# Altium PCB Flexi_encoder_BOB.pcbdoc (part 2 of 3)
Units mil, origin at the board's own origin, x right, y up, seen from the top; angles counter-clockwise.
Board outline 1230.32 x 1046.59 mil, 2 copper layers (Top Layer, Bottom Layer), stack 57.918 mil thick; 19 components, 15 nets, 2516 pads, 15 vias.
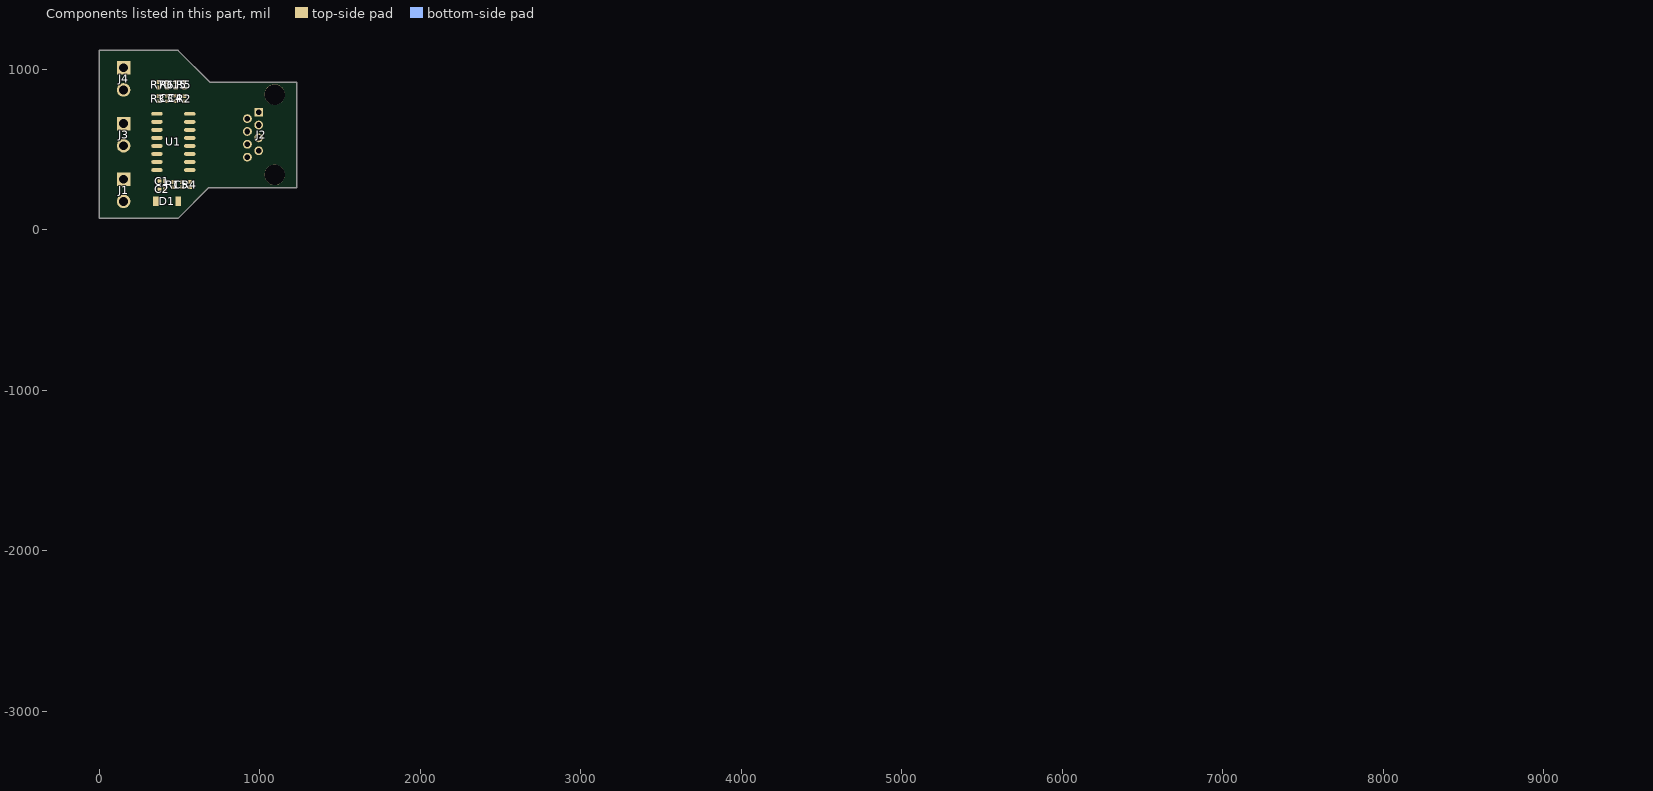
[diagram p2: the components of this part, seen from the top]

## Free pads (board coordinates)
  round 1.64 on Mech7: 1(8578.33,-3063.27) 1(8578.33,-3063.27) 1(8578.78,-3056.56) 1(8578.78,-3056.56) 1(8579.23,-3063.73) 1(8579.23,-3063.73) 1(8579.65,-3054.78) 1(8579.65,-3054.78) 1(8580.56,-3049.4) 1(8580.56,-3049.4) 1(8581.89,-3062.82) 1(8581.89,-3062.82) 1(8582.8,-3044.02) 1(8582.8,-3044.02) 1(8583.25,-3040.91) 1(8583.25,-3040.91) 1(8585.04,-3037.31) 1(8585.04,-3037.31) 1(8585.49,-3059.25) 1(8585.49,-3059.25) 1(8585.49,-3035.07) 1(8585.49,-3035.07) 1(8585.94,-3057.89) 1(8585.94,-3057.89) 1(8586.82,-3057.44) 1(8586.82,-3057.44) 1(8587.27,-3056.11) 1(8587.27,-3056.11) 1(8588.6,-3054.78) 1(8588.6,-3054.78) 1(8588.6,-3028.82) 1(8588.6,-3028.82) 1(8589.05,-3053.42) 1(8589.05,-3053.42) 1(8589.96,-3023.89) 1(8589.96,-3023.89) 1(8590.42,-3052.09) 1(8590.42,-3052.09) 1(8591.29,-3022.11) 1(8591.29,-3022.11) 1(8591.74,-3019.87) 1(8591.74,-3019.87) 1(8592.2,-3048.07) 1(8592.2,-3048.07) 1(8593.07,-3047.62) 1(8593.07,-3047.62) 1(8593.07,-3017.63) 1(8593.07,-3017.63) 1(8593.53,-3046.25) 1(8593.53,-3046.25) 1(8593.53,-3015.4) 1(8593.53,-3015.4) 1(8594.44,-3045.84) 1(8594.44,-3045.84) 1(8594.44,-2870.03) 1(8594.44,-2870.03) 1(8594.89,-3044.47) 1(8594.89,-3044.47) 1(8594.89,-2859.3) 1(8594.89,-2859.3) 1(8595.76,-2882.99) 1(8595.76,-2882.99) 1(8595.76,-2857.97) 1(8595.76,-2857.97) 1(8596.22,-3043.15) 1(8596.22,-3043.15) 1(8596.22,-3010.93) 1(8596.22,-3010.93) 1(8596.67,-3041.78) 1(8596.67,-3041.78) 1(8596.67,-3008.69) 1(8596.67,-3008.69) 1(8596.67,-2884.81) 1(8596.67,-2884.81) 1(8597.13,-2888.83) 1(8597.13,-2888.83) 1(8597.13,-2857.52) 1(8597.13,-2857.52) 1(8597.55,-2858.39) 1(8597.55,-2858.39) 1(8598,-3040.45) 1(8598,-3040.45) 1(8598.45,-2892.85) 1(8598.45,-2892.85) 1(8598.45,-2858.39) 1(8598.45,-2858.39) 1(8599.36,-3003.76) 1(8599.36,-3003.76) 1(8599.78,-3036.44) 1(8599.78,-3036.44) 1(8599.78,-3001.52) 1(8599.78,-3001.52) 1(8600.69,-2905.36) 1(8600.69,-2905.36) 1(8600.69,-2861.54) 1(8600.69,-2861.54) 1(8601.15,-3035.07) 1(8601.15,-3035.07) 1(8601.6,-3033.75) 1(8601.6,-3033.75) 1(8601.6,-2863.77) 1(8601.6,-2863.77) 1(8602.02,-2863.77) 1(8602.02,-2863.77) 1(8602.93,-3032.42) 1(8602.93,-3032.42) 1(8602.93,-2911.65) 1(8602.93,-2911.65) 1(8603.38,-3031.05) 1(8603.38,-3031.05) 1(8603.38,-2866.92) 1(8603.38,-2866.92) 1(8603.84,-2866.92) 1(8603.84,-2866.92) 1(8604.26,-2993.49) 1(8604.26,-2993.49) 1(8604.26,-2869.15) 1(8604.26,-2869.15) 1(8604.71,-3029.73) 1(8604.71,-3029.73) 1(8604.71,-2991.25) 1(8604.71,-2991.25) 1(8604.71,-2869.15) 1(8604.71,-2869.15) 1(8605.16,-3028.36) 1(8605.16,-3028.36) 1(8605.16,-2921.92) 1(8605.16,-2921.92) 1(8605.62,-2872.26) 1(8605.62,-2872.26) 1(8606.07,-2872.26) 1(8606.07,-2872.26) 1(8606.49,-3027.04) 1(8606.49,-3027.04) 1(8606.95,-3025.71) 1(8606.95,-3025.71) 1(8607.4,-2876.74) 1(8607.4,-2876.74) 1(8607.85,-2876.74) 1(8607.85,-2876.74) 1(8608.31,-2878.97) 1(8608.31,-2878.97) 1(8608.73,-2878.97) 1(8608.73,-2878.97) 1(8609.64,-3022.11) 1(8609.64,-3022.11) 1(8610.09,-3020.78) 1(8610.09,-3020.78) 1(8610.09,-2980.98) 1(8610.09,-2980.98) 1(8610.09,-2882.99) 1(8610.09,-2882.99) 1(8610.55,-2882.99) 1(8610.55,-2882.99) 1(8610.96,-2938.03) 1(8610.96,-2938.03) 1(8610.96,-2885.23) 1(8610.96,-2885.23) 1(8611.42,-2941.14) 1(8611.42,-2941.14) 1(8611.42,-2885.23) 1(8611.42,-2885.23) 1(8611.87,-2887.46) 1(8611.87,-2887.46) 1(8612.33,-3017.63) 1(8612.33,-3017.63) 1(8612.33,-2977.83) 1(8612.33,-2977.83) 1(8612.33,-2887.46) 1(8612.33,-2887.46) 1(8612.78,-2943.83) 1(8612.78,-2943.83) 1(8612.78,-2889.7) 1(8612.78,-2889.7) 1(8613.2,-3015.4) 1(8613.2,-3015.4) 1(8613.2,-2975.6) 1(8613.2,-2975.6) 1(8613.2,-2946.98) 1(8613.2,-2946.98) 1(8613.2,-2889.7) 1(8613.2,-2889.7) 1(8614.11,-3014.94) 1(8614.11,-3014.94) 1(8614.11,-2893.3) 1(8614.11,-2893.3) 1(8614.56,-3013.62) 1(8614.56,-3013.62) 1(8614.56,-2893.3) 1(8614.56,-2893.3) 1(8615.02,-2895.54) 1(8615.02,-2895.54) 1(8615.44,-2895.54) 1(8615.44,-2895.54) 1(8615.89,-3012.29) 1(8615.89,-3012.29) 1(8615.89,-2953.69) 1(8615.89,-2953.69) 1(8615.89,-2897.77) 1(8615.89,-2897.77) 1(8616.35,-3010.93) 1(8616.35,-3010.93) 1(8616.35,-2969.8) 1(8616.35,-2969.8) 1(8616.35,-2955.92) 1(8616.35,-2955.92) 1(8616.35,-2897.77) 1(8616.35,-2897.77) 1(8616.8,-2900.01) 1(8616.8,-2900.01) 1(8617.26,-2900.01) 1(8617.26,-2900.01) 1(8617.67,-2902.25) 1(8617.67,-2902.25) 1(8618.13,-3009.14) 1(8618.13,-3009.14) 1(8618.13,-2959.49) 1(8618.13,-2959.49) 1(8618.13,-2902.25) 1(8618.13,-2902.25) 1(8618.58,-3007.82) 1(8618.58,-3007.82) 1(8618.58,-2966.65) 1(8618.58,-2966.65) 1(8618.58,-2961.72) 1(8618.58,-2961.72) 1(8618.58,-2904.48) 1(8618.58,-2904.48) 1(8619.04,-2904.48) 1(8619.04,-2904.48) 1(8619.49,-2964.41) 1(8619.49,-2964.41) 1(8619.91,-3006.45) 1(8619.91,-3006.45) 1(8619.91,-2963.96) 1(8619.91,-2963.96) 1(8619.91,-2907.59) 1(8619.91,-2907.59) 1(8620.37,-3005.12) 1(8620.37,-3005.12) 1(8620.37,-2907.59) 1(8620.37,-2907.59) 1(8620.82,-2909.83) 1(8620.82,-2909.83) 1(8621.27,-2909.83) 1(8621.27,-2909.83) 1(8621.73,-3003.76) 1(8621.73,-3003.76) 1(8622.15,-2912.97) 1(8622.15,-2912.97) 1(8622.6,-3001.52) 1(8622.6,-3001.52) 1(8622.6,-2912.97) 1(8622.6,-2912.97) 1(8623.51,-3001.11) 1(8623.51,-3001.11) 1(8623.96,-2999.74) 1(8623.96,-2999.74) 1(8624.38,-2916.54) 1(8624.38,-2916.54) 1(8625.75,-2997.96) 1(8625.75,-2997.96) 1(8626.2,-2996.63) 1(8626.2,-2996.63) 1(8626.2,-2922.83) 1(8626.2,-2922.83) 1(8626.62,-2922.83) 1(8626.62,-2922.83) 1(8627.08,-2996.18) 1(8627.08,-2996.18) 1(8627.08,-2925.07) 1(8627.08,-2925.07) 1(8627.53,-2994.82) 1(8627.53,-2994.82) 1(8627.53,-2925.07) 1(8627.53,-2925.07) 1(8628.44,-2994.4) 1(8628.44,-2994.4) 1(8628.86,-2993.03) 1(8628.86,-2993.03) 1(8629.76,-2992.58) 1(8629.76,-2992.58) 1(8630.22,-2991.25) 1(8630.22,-2991.25) 1(8631.55,-2990.34) 1(8631.55,-2990.34) 1(8632.46,-2934.88) 1(8632.46,-2934.88) 1(8632.91,-2937.12) 1(8632.91,-2937.12) 1(8633.33,-2937.12) 1(8633.33,-2937.12) 1(8634.24,-2939.81) 1(8634.24,-2939.81) 1(8635.57,-2997.96) 1(8635.57,-2997.96) 1(8636.93,-2937.12) 1(8636.93,-2937.12) 1(8637.38,-2935.79) 1(8637.38,-2935.79) 1(8639.17,-2932.65) 1(8639.17,-2932.65) 1(8640.49,-2931.32) 1(8640.49,-2931.32) 1(8640.95,-2929.96) 1(8640.95,-2929.96) 1(8641.86,-3010.05) 1(8641.86,-3010.05) 1(8642.28,-3011.38) 1(8642.28,-3011.38) 1(8642.73,-2928.63) 1(8642.73,-2928.63) 1(8643.18,-2927.3) 1(8643.18,-2927.3) 1(8644.09,-2926.85) 1(8644.09,-2926.85) 1(8644.51,-3014.52) 1(8644.51,-3014.52) 1(8644.51,-2925.48) 1(8644.51,-2925.48) 1(8644.97,-3015.85) 1(8644.97,-3015.85) 1(8646.33,-3017.18) 1(8646.33,-3017.18) 1(8646.75,-3018.54) 1(8646.75,-3018.54) 1(8647.2,-2922.83) 1(8647.2,-2922.83) 1(8647.66,-2921.47) 1(8647.66,-2921.47) 1(8648.11,-3019.87) 1(8648.11,-3019.87) 1(8648.57,-3021.23) 1(8648.57,-3021.23) 1(8648.98,-2967.98) 1(8648.98,-2967.98) 1(8649.44,-3021.65) 1(8649.44,-3021.65) 1(8649.44,-2967.98) 1(8649.44,-2967.98) 1(8649.44,-2918.36) 1(8649.44,-2918.36) 1(8649.89,-3023.02) 1(8649.89,-3023.02) 1(8650.35,-2970.21) 1(8650.35,-2970.21) 1(8650.8,-2970.21) 1(8650.8,-2970.21) 1(8651.22,-2965.74) 1(8651.22,-2965.74) 1(8651.22,-2916.99) 1(8651.22,-2916.99) 1(8651.68,-2964.41) 1(8651.68,-2964.41) 1(8651.68,-2915.67) 1(8651.68,-2915.67) 1(8652.13,-3026.13) 1(8652.13,-3026.13) 1(8652.13,-2973.36) 1(8652.13,-2973.36) 1(8652.58,-3027.49) 1(8652.58,-3027.49) 1(8652.58,-2973.36) 1(8652.58,-2973.36) 1(8653.46,-2975.6) 1(8653.46,-2975.6) 1(8653.46,-2963.09) 1(8653.46,-2963.09) 1(8653.91,-3028.82) 1(8653.91,-3028.82) 1(8653.91,-2975.6) 1(8653.91,-2975.6) 1(8653.91,-2961.72) 1(8653.91,-2961.72) 1(8654.37,-3030.18) 1(8654.37,-3030.18) 1(8654.82,-2977.83) 1(8654.82,-2977.83) 1(8655.28,-2977.83) 1(8655.28,-2977.83) 1(8655.69,-3031.51) 1(8655.69,-3031.51) 1(8655.69,-2960.39) 1(8655.69,-2960.39) 1(8656.15,-3032.84) 1(8656.15,-3032.84) 1(8656.15,-2980.07) 1(8656.15,-2980.07) 1(8656.15,-2959.03) 1(8656.15,-2959.03) 1(8656.15,-2911.65) 1(8656.15,-2911.65) 1(8656.6,-2980.07) 1(8656.6,-2980.07) 1(8656.6,-2910.28) 1(8656.6,-2910.28) 1(8657.06,-3033.29) 1(8657.06,-3033.29) 1(8657.51,-3034.65) 1(8657.51,-3034.65) 1(8657.51,-2982.31) 1(8657.51,-2982.31) 1(8657.93,-2982.31) 1(8657.93,-2982.31) 1(8658.39,-3035.07) 1(8658.39,-3035.07) 1(8658.39,-2983.63) 1(8658.39,-2983.63) 1(8658.39,-2957.25) 1(8658.39,-2957.25) 1(8658.39,-2908.96) 1(8658.39,-2908.96) 1(8658.84,-3036.44) 1(8658.84,-3036.44) 1(8658.84,-2983.63) 1(8658.84,-2983.63) 1(8658.84,-2955.92) 1(8658.84,-2955.92) 1(8658.84,-2907.59) 1(8658.84,-2907.59) 1(8659.29,-2985) 1(8659.29,-2985) 1(8659.75,-3036.89) 1(8659.75,-3036.89) 1(8659.75,-2985) 1(8659.75,-2985) 1(8660.17,-3038.22) 1(8660.17,-3038.22) 1(8660.17,-2986.32) 1(8660.17,-2986.32) 1(8660.62,-2986.32) 1(8660.62,-2986.32) 1(8660.62,-2906.27) 1(8660.62,-2906.27) 1(8661.08,-2987.69) 1(8661.08,-2987.69) 1(8661.08,-2904.94) 1(8661.08,-2904.94) 1(8661.53,-3039.13) 1(8661.53,-3039.13) 1(8661.53,-2987.69) 1(8661.53,-2987.69) 1(8661.98,-3040.45) 1(8661.98,-3040.45) 1(8661.98,-2989.01) 1(8661.98,-2989.01) 1(8662.4,-2989.01) 1(8662.4,-2989.01) 1(8663.31,-2903.12) 1(8663.31,-2903.12) 1(8663.77,-3041.78) 1(8663.77,-3041.78) 1(8663.77,-2901.79) 1(8663.77,-2901.79) 1(8664.22,-3043.15) 1(8664.22,-3043.15) 1(8664.22,-2992.16) 1(8664.22,-2992.16) 1(8664.64,-2992.16) 1(8664.64,-2992.16) 1(8665.55,-2993.94) 1(8665.55,-2993.94) 1(8666,-3044.47) 1(8666,-3044.47) 1(8666,-2993.94) 1(8666,-2993.94) 1(8666.46,-3045.84) 1(8666.46,-3045.84) 1(8666.46,-2995.27) 1(8666.46,-2995.27) 1(8666.88,-2995.27) 1(8666.88,-2995.27) 1(8667.79,-2997.05) 1(8667.79,-2997.05) 1(8668.24,-3047.16) 1(8668.24,-3047.16) 1(8668.24,-2997.05) 1(8668.24,-2997.05) 1(8668.69,-3048.49) 1(8668.69,-3048.49) 1(8668.69,-2998.41) 1(8668.69,-2998.41) 1(8669.11,-2998.41) 1(8669.11,-2998.41) 1(8670.02,-3000.2) 1(8670.02,-3000.2) 1(8670.48,-3049.86) 1(8670.48,-3049.86) 1(8670.48,-3000.2) 1(8670.48,-3000.2) 1(8670.93,-3051.18) 1(8670.93,-3051.18) 1(8670.93,-3001.52) 1(8670.93,-3001.52) 1(8670.93,-2944.28) 1(8670.93,-2944.28) 1(8671.35,-3001.52) 1(8671.35,-3001.52) 1(8671.35,-2942.96) 1(8671.35,-2942.96) 1(8672.26,-3003.34) 1(8672.26,-3003.34) 1(8672.71,-3003.34) 1(8672.71,-3003.34) 1(8673.17,-3004.67) 1(8673.17,-3004.67) 1(8673.59,-3004.67) 1(8673.59,-3004.67) 1(8673.59,-2940.72) 1(8673.59,-2940.72) 1(8674.5,-3006.45) 1(8674.5,-3006.45) 1(8674.95,-3006.45) 1(8674.95,-3006.45) 1(8674.95,-2940.27) 1(8674.95,-2940.27) 1(8676.28,-3007.82) 1(8676.28,-3007.82) 1(8676.28,-2938.48) 1(8676.28,-2938.48) 1(8676.73,-3009.14) 1(8676.73,-3009.14) 1(8677.19,-3009.14) 1(8677.19,-3009.14) 1(8677.64,-2938.03) 1(8677.64,-2938.03) 1(8678.97,-3010.93) 1(8678.97,-3010.93) 1(8678.97,-2886.59) 1(8678.97,-2886.59) 1(8679.42,-3012.29) 1(8679.42,-3012.29) 1(8679.88,-3012.29) 1(8679.88,-3012.29) 1(8680.3,-2886.14) 1(8680.3,-2886.14) 1(8682.11,-2933.1) 1(8682.11,-2933.1) 1(8683.44,-2932.65) 1(8683.44,-2932.65) 1(8684.35,-3016.76) 1(8684.35,-3016.76) 1(8684.35,-2881.66) 1(8684.35,-2881.66) 1(8684.77,-3018.09) 1(8684.77,-3018.09) 1(8684.77,-2930.87) 1(8684.77,-2930.87) 1(8685.22,-3018.09) 1(8685.22,-3018.09) 1(8685.68,-2881.21) 1(8685.68,-2881.21) 1(8686.13,-2930.41) 1(8686.13,-2930.41) 1(8687.46,-3067.75) 1(8687.46,-3067.75) 1(8687.46,-2879.43) 1(8687.46,-2879.43) 1(8687.91,-2928.17) 1(8687.91,-2928.17) 1(8688.82,-3068.2) 1(8688.82,-3068.2) 1(8688.82,-2878.97) 1(8688.82,-2878.97) 1(8689.24,-2927.72) 1(8689.24,-2927.72) 1(8690.15,-3069.98) 1(8690.15,-3069.98) 1(8690.15,-2877.19) 1(8690.15,-2877.19) 1(8691.48,-3070.44) 1(8691.48,-3070.44) 1(8691.48,-2876.74) 1(8691.48,-2876.74) 1(8691.93,-2925.07) 1(8691.93,-2925.07) 1(8693.3,-3072.67) 1(8693.3,-3072.67) 1(8693.3,-2924.61) 1(8693.3,-2924.61) 1(8693.3,-2874.5) 1(8693.3,-2874.5) 1(8693.71,-2923.7) 1(8693.71,-2923.7) 1(8694.62,-3073.09) 1(8694.62,-3073.09) 1(8694.62,-2874.04) 1(8694.62,-2874.04) 1(8695.08,-2923.25) 1(8695.08,-2923.25) 1(8695.95,-3074.91) 1(8695.95,-3074.91) 1(8695.95,-2872.26) 1(8695.95,-2872.26) 1(8696.86,-3030.18) 1(8696.86,-3030.18) 1(8697.31,-3075.33) 1(8697.31,-3075.33) 1(8697.31,-2871.81) 1(8697.31,-2871.81) 1(8697.77,-3030.18) 1(8697.77,-3030.18) 1(8697.77,-2920.59) 1(8697.77,-2920.59) 1(8698.19,-3076.69) 1(8698.19,-3076.69) 1(8699.1,-2920.14) 1(8699.1,-2920.14) 1(8699.1,-2870.03) 1(8699.1,-2870.03) 1(8699.55,-3077.15) 1(8699.55,-3077.15) 1(8699.55,-3032.42) 1(8699.55,-3032.42) 1(8700,-3078.02) 1(8700,-3078.02) 1(8700.42,-3032.42) 1(8700.42,-3032.42) 1(8700.42,-2869.57) 1(8700.42,-2869.57) 1(8700.88,-2918.36) 1(8700.88,-2918.36) 1(8701.33,-3078.47) 1(8701.33,-3078.47) 1(8701.79,-3079.38) 1(8701.79,-3079.38) 1(8702.24,-2917.9) 1(8702.24,-2917.9) 1(8702.24,-2867.79) 1(8702.24,-2867.79) 1(8702.66,-3035.07) 1(8702.66,-3035.07) 1(8703.11,-3079.8) 1(8703.11,-3079.8) 1(8703.57,-3035.07) 1(8703.57,-3035.07) 1(8703.57,-2867.34) 1(8703.57,-2867.34) 1(8704.02,-2916.12) 1(8704.02,-2916.12) 1(8704.48,-3081.17) 1(8704.48,-3081.17) 1(8705.35,-3037.31) 1(8705.35,-3037.31) 1(8705.35,-2915.67) 1(8705.35,-2915.67) 1(8705.35,-2865.55) 1(8705.35,-2865.55) 1(8705.81,-3081.62) 1(8705.81,-3081.62) 1(8706.26,-3037.31) 1(8706.26,-3037.31) 1(8707.13,-3082.95) 1(8707.13,-3082.95) 1(8707.13,-3038.67) 1(8707.13,-3038.67) 1(8707.13,-2913.88) 1(8707.13,-2913.88) 1(8708.04,-3038.67) 1(8708.04,-3038.67) 1(8708.5,-3039.55) 1(8708.5,-3039.55) 1(8708.5,-2913.43) 1(8708.5,-2913.43) 1(8708.95,-2912.52) 1(8708.95,-2912.52) 1(8709.37,-3083.86) 1(8709.37,-3083.86) 1(8709.37,-3039.55) 1(8709.37,-3039.55) 1(8710.28,-3040.91) 1(8710.28,-3040.91) 1(8710.28,-2863.32) 1(8710.28,-2863.32) 1(8710.73,-3085.18) 1(8710.73,-3085.18) 1(8711.19,-3040.91) 1(8711.19,-3040.91) 1(8711.61,-3041.78) 1(8711.61,-3041.78) 1(8712.06,-3085.64) 1(8712.06,-3085.64) 1(8712.06,-2911.19) 1(8712.06,-2911.19) 1(8712.06,-2861.54) 1(8712.06,-2861.54) 1(8712.52,-3041.78) 1(8712.52,-3041.78) 1(8713.42,-3086.97) 1(8713.42,-3086.97) 1(8713.42,-3043.15) 1(8713.42,-3043.15) 1(8713.42,-2909.83) 1(8713.42,-2909.83) 1(8714.3,-3043.15) 1(8714.3,-3043.15) 1(8714.75,-3087.42) 1(8714.75,-3087.42) 1(8714.75,-3044.02) 1(8714.75,-3044.02) 1(8714.75,-2909.41) 1(8714.75,-2909.41) 1(8715.21,-2908.5) 1(8715.21,-2908.5) 1(8715.21,-2860.21) 1(8715.21,-2860.21) 1(8715.66,-3044.02) 1(8715.66,-3044.02) 1(8716.53,-3045.38) 1(8716.53,-3045.38) 1(8717.44,-3045.38) 1(8717.44,-3045.38) 1(8717.9,-3089.66) 1(8717.9,-3089.66) 1(8717.9,-3046.25) 1(8717.9,-3046.25) 1(8718.32,-2906.72) 1(8718.32,-2906.72) 1(8718.77,-3046.25) 1(8718.77,-3046.25) 1(8718.77,-2857.97) 1(8718.77,-2857.97) 1(8719.23,-3090.11) 1(8719.23,-3090.11) 1(8719.23,-3047.16) 1(8719.23,-3047.16) 1(8720.13,-3047.16) 1(8720.13,-3047.16) 1(8720.55,-3048.07) 1(8720.55,-3048.07) 1(8720.55,-2905.81) 1(8720.55,-2905.81) 1(8721.46,-3048.07) 1(8721.46,-3048.07) 1(8721.92,-3048.95) 1(8721.92,-3048.95) 1(8721.92,-2904.48) 1(8721.92,-2904.48) 1(8721.92,-2856.15) 1(8721.92,-2856.15) 1(8722.37,-3092.35) 1(8722.37,-3092.35) 1(8722.79,-3048.95) 1(8722.79,-3048.95) 1(8723.24,-3049.86) 1(8723.24,-3049.86) 1(8724.15,-3049.86) 1(8724.15,-3049.86) 1(8725.03,-2902.7) 1(8725.03,-2902.7) 1(8725.48,-3051.18) 1(8725.48,-3051.18) 1(8726.39,-3051.18) 1(8726.39,-3051.18) 1(8728.17,-2900.88) 1(8728.17,-2900.88) 1(8730.41,-2900.47) 1(8730.41,-2900.47) 1(8730.86,-3096.82) 1(8730.86,-3096.82) 1(8733.1,-3097.28) 1(8733.1,-3097.28) 1(8733.97,-3098.15) 1(8733.97,-3098.15) 1(8736.21,-3098.6) 1(8736.21,-3098.6) 1(8736.21,-2848.57) 1(8736.21,-2848.57) 1(8738.03,-3099.93) 1(8738.03,-3099.93) 1(8738.45,-2895.99) 1(8738.45,-2895.99) 1(8740.26,-3100.39) 1(8740.26,-3100.39) 1(8740.68,-2895.54) 1(8740.68,-2895.54) 1(8741.14,-2847.21) 1(8741.14,-2847.21) 1(8741.59,-3059.25) 1(8741.59,-3059.25) 1(8741.59,-2894.63) 1(8741.59,-2894.63) 1(8742.92,-3059.25) 1(8742.92,-3059.25) 1(8743.37,-3102.17) 1(8743.37,-3102.17) 1(8743.83,-2845.43) 1(8743.83,-2845.43) 1(8744.74,-3060.58) 1(8744.74,-3060.58) 1(8745.15,-2893.75) 1(8745.15,-2893.75) 1(8746.06,-3060.58) 1(8746.06,-3060.58) 1(8746.97,-3061.49) 1(8746.97,-3061.49) 1(8748.3,-3061.49) 1(8748.3,-3061.49) 1(8748.75,-2891.94) 1(8748.75,-2891.94) 1(8750.54,-3062.82) 1(8750.54,-3062.82) 1(8750.99,-3104.86) 1(8750.99,-3104.86) 1(8751.44,-2843.19) 1(8751.44,-2843.19) 1(8751.86,-3062.82) 1(8751.86,-3062.82) 1(8755.46,-3064.6) 1(8755.46,-3064.6) 1(8756.34,-2889.7) 1(8756.34,-2889.7) 1(8756.79,-3064.6) 1(8756.79,-3064.6) 1(8758.57,-3107.55) 1(8758.57,-3107.55) 1(8759.48,-3065.97) 1(8759.48,-3065.97) 1(8759.48,-2840.08) 1(8759.48,-2840.08) 1(8759.94,-2887.92) 1(8759.94,-2887.92) 1(8761.26,-3065.97) 1(8761.26,-3065.97) 1(8762.17,-3066.84) 1(8762.17,-3066.84) 1(8763.5,-3066.84) 1(8763.5,-3066.84) 1(8763.5,-2839.62) 1(8763.5,-2839.62) 1(8764.41,-2887.04) 1(8764.41,-2887.04) 1(8766.65,-3067.75) 1(8766.65,-3067.75) 1(8767.1,-2885.68) 1(8767.1,-2885.68) 1(8767.52,-2837.84) 1(8767.52,-2837.84) 1(8770.66,-3069.07) 1(8770.66,-3069.07) 1(8771.12,-3110.69) 1(8771.12,-3110.69) 1(8772.9,-3069.07) 1(8772.9,-3069.07) 1(8774.23,-3069.98) 1(8774.23,-3069.98) 1(8774.23,-2883.9) 1(8774.23,-2883.9) 1(8775.14,-3111.11) 1(8775.14,-3111.11) 1(8776.05,-2836.48) 1(8776.05,-2836.48) 1(8776.47,-3069.98) 1(8776.47,-3069.98) 1(8778.28,-3070.86) 1(8778.28,-3070.86) 1(8778.28,-2883.45) 1(8778.28,-2883.45) 1(8780.94,-3070.86) 1(8780.94,-3070.86) 1(8782.3,-2882.12) 1(8782.3,-2882.12) 1(8782.76,-3071.76) 1(8782.76,-3071.76) 1(8783.63,-3113.35) 1(8783.63,-3113.35) 1(8784.54,-2834.24) 1(8784.54,-2834.24) 1(8784.99,-3071.76) 1(8784.99,-3071.76) 1(8786.77,-3072.67) 1(8786.77,-3072.67) 1(8788.1,-2881.66) 1(8788.1,-2881.66) 1(8789.01,-3072.67) 1(8789.01,-3072.67) 1(8790.34,-2880.75) 1(8790.34,-2880.75) 1(8790.79,-3073.55) 1(8790.79,-3073.55) 1(8793.03,-3073.55) 1(8793.03,-3073.55) 1(8795.72,-2832.91) 1(8795.72,-2832.91) 1(8796.17,-2880.34) 1(8796.17,-2880.34) 1(8797.05,-3074.46) 1(8797.05,-3074.46) 1(8797.96,-2832.01) 1(8797.96,-2832.01) 1(8798.41,-2879.43) 1(8798.41,-2879.43) 1(8801.52,-3074.46) 1(8801.52,-3074.46) 1(8804.21,-2878.52) 1(8804.21,-2878.52) 1(8805.54,-3075.33) 1(8805.54,-3075.33) 1(8805.99,-3116.49) 1(8805.99,-3116.49) 1(8810.01,-3075.33) 1(8810.01,-3075.33) 1(8811.83,-2830.68) 1(8811.83,-2830.68) 1(8816.72,-2877.64) 1(8816.72,-2877.64) 1(8818.96,-3076.69) 1(8818.96,-3076.69) 1(8821.19,-2830.22) 1(8821.19,-2830.22) 1(8827.9,-3076.69) 1(8827.9,-3076.69) 1(8830.14,-3117.82) 1(8830.14,-3117.82) 1(8838.21,-2877.19) 1(8838.21,-2877.19) 1(8850.27,-2830.68) 1(8850.27,-2830.68) 1(8852.09,-2878.1) 1(8852.09,-2878.1) 1(8855.2,-2830.68) 1(8855.2,-2830.68) 1(8861.03,-2879.43) 1(8861.03,-2879.43) 1(8863.27,-3077.15) 1(8863.27,-3077.15) 1(8869.52,-2879.88) 1(8869.52,-2879.88) 1(8870.4,-2832.46) 1(8870.4,-2832.46) 1(8871.31,-3117.4) 1(8871.31,-3117.4) 1(8873.09,-2880.75) 1(8873.09,-2880.75) 1(8875.78,-2832.46) 1(8875.78,-2832.46) 1(8878.92,-2881.21) 1(8878.92,-2881.21) 1(8883.82,-2882.57) 1(8883.82,-2882.57) 1(8887.87,-3075.33) 1(8887.87,-3075.33) 1(8888.29,-2834.24) 1(8888.29,-2834.24) 1(8890.98,-2883.45) 1(8890.98,-2883.45) 1(8892.34,-3074.46) 1(8892.34,-3074.46) 1(8896.36,-2836.02) 1(8896.36,-2836.02) 1(8901.29,-2886.14) 1(8901.29,-2886.14) 1(8901.71,-3074) 1(8901.71,-3074) 1(8901.71,-2836.02) 1(8901.71,-2836.02) 1(8903.53,-3114.71) 1(8903.53,-3114.71) 1(8904.4,-2886.59) 1(8904.4,-2886.59) 1(8905.76,-2887.46) 1(8905.76,-2887.46) 1(8907.09,-2837.84) 1(8907.09,-2837.84) 1(8909.78,-2837.84) 1(8909.78,-2837.84) 1(8913.35,-2888.83) 1(8913.35,-2888.83) 1(8914.71,-2889.7) 1(8914.71,-2889.7) 1(8917.82,-2840.08) 1(8917.82,-2840.08) 1(8919.18,-2890.61) 1(8919.18,-2890.61) 1(8920.51,-2840.08) 1(8920.51,-2840.08) 1(8921.42,-2891.94) 1(8921.42,-2891.94) 1(8926.31,-2892.85) 1(8926.31,-2892.85) 1(8929,-3111.57) 1(8929,-3111.57) 1(8934.84,-3110.24) 1(8934.84,-3110.24) 1(8935.71,-2896.41) 1(8935.71,-2896.41) 1(8937.07,-3069.07) 1(8937.07,-3069.07) 1(8939.31,-3068.2) 1(8939.31,-3068.2) 1(8940.64,-3109.78) 1(8940.64,-3109.78) 1(8943.33,-2898.65) 1(8943.33,-2898.65) 1(8944.2,-3067.75) 1(8944.2,-3067.75) 1(8945.57,-2900.01) 1(8945.57,-2900.01) 1(8946.02,-2846.33) 1(8946.02,-2846.33) 1(8951.82,-3107.55) 1(8951.82,-3107.55) 1(8951.82,-2901.79) 1(8951.82,-2901.79) 1(8954.06,-2849.44) 1(8954.06,-2849.44) 1(8954.97,-2903.57) 1(8954.97,-2903.57) 1(8955.38,-3065.51) 1(8955.38,-3065.51) 1(8955.84,-2849.44) 1(8955.84,-2849.44) 1(8957.62,-3107.1) 1(8957.62,-3107.1) 1(8962.55,-3065.06) 1(8962.55,-3065.06) 1(8963,-3105.77) 1(8963,-3105.77) 1(8965.24,-2906.72) 1(8965.24,-2906.72) 1(8966.57,-3063.73) 1(8966.57,-3063.73) 1(8967.93,-3105.31) 1(8967.93,-3105.31) 1(8968.39,-2908.5) 1(8968.39,-2908.5) 1(8970.17,-3104.4) 1(8970.17,-3104.4) 1(8970.62,-2908.96) 1(8970.62,-2908.96) 1(8970.62,-2854.37) 1(8970.62,-2854.37) 1(8972.4,-3063.27) 1(8972.4,-3063.27) 1(8972.4,-2854.37) 1(8972.4,-2854.37) 1(8972.86,-2910.28) 1(8972.86,-2910.28) 1(8974.19,-2855.73) 1(8974.19,-2855.73) 1(8975.51,-2855.73) 1(8975.51,-2855.73) 1(8976.42,-2856.61) 1(8976.42,-2856.61) 1(8977.75,-3061.91) 1(8977.75,-3061.91) 1(8977.75,-2856.61) 1(8977.75,-2856.61) 1(8980.44,-2912.52) 1(8980.44,-2912.52) 1(8981.8,-2858.39) 1(8981.8,-2858.39) 1(8982.68,-2913.88) 1(8982.68,-2913.88) 1(8983.59,-3061.49) 1(8983.59,-3061.49) 1(8983.59,-2858.39) 1(8983.59,-2858.39) 1(8984.91,-2914.3) 1(8984.91,-2914.3) 1(8985.37,-2859.75) 1(8985.37,-2859.75) 1(8985.82,-2915.21) 1(8985.82,-2915.21) 1(8986.28,-3101.75) 1(8986.28,-3101.75) 1(8986.7,-2859.75) 1(8986.7,-2859.75) 1(8987.6,-2860.63) 1(8987.6,-2860.63) 1(8988.06,-2915.67) 1(8988.06,-2915.67) 1(8988.93,-2860.63) 1(8988.93,-2860.63) 1(8990.3,-3100.39) 1(8990.3,-3100.39) 1(8992.99,-2862.44) 1(8992.99,-2862.44) 1(8993.4,-3059.67) 1(8993.4,-3059.67) 1(8993.86,-2918.77) 1(8993.86,-2918.77) 1(8994.31,-3099.93) 1(8994.31,-3099.93) 1(8994.77,-2862.44) 1(8994.77,-2862.44) 1(8995.22,-3058.8) 1(8995.22,-3058.8) 1(8996.55,-2863.77) 1(8996.55,-2863.77) 1(8997.46,-2919.68) 1(8997.46,-2919.68) 1(8997.88,-2863.77) 1(8997.88,-2863.77) 1(8998.33,-3098.6) 1(8998.33,-3098.6) 1(8998.79,-2864.68) 1(8998.79,-2864.68) 1(9000.11,-2864.68) 1(9000.11,-2864.68) 1(9001.02,-3058.35) 1(9001.02,-3058.35) 1(9001.02,-2921.92) 1(9001.02,-2921.92) 1(9001.02,-2865.55) 1(9001.02,-2865.55) 1(9002.35,-3098.15) 1(9002.35,-3098.15) 1(9002.35,-2865.55) 1(9002.35,-2865.55) 1(9003.26,-2922.38) 1(9003.26,-2922.38) 1(9003.26,-2866.46) 1(9003.26,-2866.46) 1(9004.59,-2866.46) 1(9004.59,-2866.46) 1(9006.41,-3096.82) 1(9006.41,-3096.82) 1(9007.28,-3056.56) 1(9007.28,-3056.56) 1(9007.73,-2925.07) 1(9007.73,-2925.07) 1(9007.73,-2868.24) 1(9007.73,-2868.24) 1(9009.06,-2868.24) 1(9009.06,-2868.24) 1(9009.97,-2925.48) 1(9009.97,-2925.48) 1(9009.97,-2869.15) 1(9009.97,-2869.15) 1(9010.42,-3096.37) 1(9010.42,-3096.37) 1(9011.3,-2869.15) 1(9011.3,-2869.15) 1(9012.21,-2926.85) 1(9012.21,-2926.85) 1(9013.11,-3056.11) 1(9013.11,-3056.11) 1(9014.44,-3095.04) 1(9014.44,-3095.04) 1(9014.44,-2927.3) 1(9014.44,-2927.3) 1(9015.77,-2871.81) 1(9015.77,-2871.81) 1(9017.13,-2871.81) 1(9017.13,-2871.81) 1(9018.01,-2929.54) 1(9018.01,-2929.54) 1(9018.01,-2872.72) 1(9018.01,-2872.72) 1(9018.46,-3094.58) 1(9018.46,-3094.58) 1(9019.37,-3054.33) 1(9019.37,-3054.33) 1(9019.37,-2872.72) 1(9019.37,-2872.72) 1(9020.24,-2929.96) 1(9020.24,-2929.96) 1(9020.24,-2873.63) 1(9020.24,-2873.63) 1(9021.61,-2873.63) 1(9021.61,-2873.63) 1(9024.72,-3092.8) 1(9024.72,-3092.8) 1(9025.62,-3053.42) 1(9025.62,-3053.42) 1(9030.55,-2935.34) 1(9030.55,-2935.34) 1(9031.01,-3091.89) 1(9031.01,-3091.89) 1(9031.43,-3051.64) 1(9031.43,-3051.64) 1(9032.79,-2879.43) 1(9032.79,-2879.43) 1(9034.12,-2879.43) 1(9034.12,-2879.43) 1(9037.26,-2938.9) 1(9037.26,-2938.9) 1(9039.5,-2939.36) 1(9039.5,-2939.36) 1(9039.95,-3050.73) 1(9039.95,-3050.73) 1(9043.52,-3088.33) 1(9043.52,-3088.33) 1(9043.97,-2884.81) 1(9043.97,-2884.81) 1(9045.3,-2884.81) 1(9045.3,-2884.81) 1(9047.08,-3048.95) 1(9047.08,-3048.95) 1(9049.77,-2887.46) 1(9049.77,-2887.46) 1(9050.23,-3047.62) 1(9050.23,-3047.62) 1(9051.13,-2887.46) 1(9051.13,-2887.46) 1(9051.55,-2888.37) 1(9051.55,-2888.37) 1(9052.46,-2888.37) 1(9052.46,-2888.37) 1(9052.92,-2946.52) 1(9052.92,-2946.52) 1(9053.79,-2889.7) 1(9053.79,-2889.7) 1(9054.7,-2889.7) 1(9054.7,-2889.7) 1(9057.84,-2891.94) 1(9057.84,-2891.94) 1(9058.72,-2891.94) 1(9058.72,-2891.94) 1(9062.74,-3045.38) 1(9062.74,-3045.38) 1(9066.79,-2896.41) 1(9066.79,-2896.41) 1(9068.12,-2896.41) 1(9068.12,-2896.41) 1(9068.57,-2897.32) 1(9068.57,-2897.32) 1(9069.45,-2897.32) 1(9069.45,-2897.32) 1(9070.81,-2898.65) 1(9070.81,-2898.65) 1(9071.26,-2955.47) 1(9071.26,-2955.47) 1(9071.68,-2898.65) 1(9071.68,-2898.65) 1(9072.59,-3043.15) 1(9072.59,-3043.15) 1(9072.59,-2956.8) 1(9072.59,-2956.8) 1(9073.92,-2957.25) 1(9073.92,-2957.25) 1(9074.83,-2900.88) 1(9074.83,-2900.88) 1(9075.74,-3041.78) 1(9075.74,-3041.78) 1(9075.74,-2900.88) 1(9075.74,-2900.88) 1(9077.06,-2959.49) 1(9077.06,-2959.49) 1(9079.75,-2903.12) 1(9079.75,-2903.12) 1(9080.21,-2961.27) 1(9080.21,-2961.27) 1(9081.08,-2904.48) 1(9081.08,-2904.48) 1(9081.99,-2904.48) 1(9081.99,-2904.48) 1(9083.32,-2905.81) 1(9083.32,-2905.81) 1(9084.23,-3078.02) 1(9084.23,-3078.02) 1(9084.23,-2905.81) 1(9084.23,-2905.81) 1(9085.56,-2907.17) 1(9085.56,-2907.17) 1(9086.47,-2907.17) 1(9086.47,-2907.17) 1(9087.34,-3077.57) 1(9087.34,-3077.57) 1(9087.79,-2908.5) 1(9087.79,-2908.5) 1(9088.7,-3039.55) 1(9088.7,-3039.55) 1(9088.7,-2908.5) 1(9088.7,-2908.5) 1(9089.57,-2966.2) 1(9089.57,-2966.2) 1(9090.48,-3076.24) 1(9090.48,-3076.24) 1(9092.26,-2910.74) 1(9092.26,-2910.74) 1(9092.72,-2967.98) 1(9092.72,-2967.98) 1(9093.63,-3075.78) 1(9093.63,-3075.78) 1(9095.41,-3037.31) 1(9095.41,-3037.31) 1(9095.41,-2912.97) 1(9095.41,-2912.97) 1(9095.86,-2969.8) 1(9095.86,-2969.8) 1(9096.28,-2912.97) 1(9096.28,-2912.97) 1(9096.74,-3074.46) 1(9096.74,-3074.46) 1(9096.74,-2913.88) 1(9096.74,-2913.88) 1(9097.65,-2913.88) 1(9097.65,-2913.88) 1(9098.97,-2971.58) 1(9098.97,-2971.58) 1(9098.97,-2915.21) 1(9098.97,-2915.21) 1(9099.88,-3074) 1(9099.88,-3074) 1(9099.88,-2915.21) 1(9099.88,-2915.21) 1(9102.12,-3035.98) 1(9102.12,-3035.98) 1(9102.12,-2973.36) 1(9102.12,-2973.36) 1(9102.99,-3072.67) 1(9102.99,-3072.67) 1(9103.45,-2917.45) 1(9103.45,-2917.45) 1(9105.23,-2975.14) 1(9105.23,-2975.14) 1(9106.14,-3072.22) 1(9106.14,-3072.22) 1(9106.59,-2919.68) 1(9106.59,-2919.68) 1(9107.47,-2919.68) 1(9107.47,-2919.68) 1(9107.92,-2920.59) 1(9107.92,-2920.59) 1(9108.37,-2976.92) 1(9108.37,-2976.92) 1(9108.83,-2920.59) 1(9108.83,-2920.59) 1(9109.28,-3070.86) 1(9109.28,-3070.86) 1(9109.28,-2921.47) 1(9109.28,-2921.47) 1(9110.16,-2921.47) 1(9110.16,-2921.47) 1(9110.61,-2977.83) 1(9110.61,-2977.83) 1(9110.61,-2922.38) 1(9110.61,-2922.38) 1(9111.52,-3033.75) 1(9111.52,-3033.75) 1(9111.52,-2922.38) 1(9111.52,-2922.38) 1(9111.94,-2923.25) 1(9111.94,-2923.25) 1(9112.39,-3070.44) 1(9112.39,-3070.44) 1(9112.85,-2923.25) 1(9112.85,-2923.25) 1(9113.3,-2924.16) 1(9113.3,-2924.16) 1(9113.76,-2980.07) 1(9113.76,-2980.07) 1(9114.17,-2924.16) 1(9114.17,-2924.16) 1(9114.63,-3032.42) 1(9114.63,-3032.42) 1(9114.63,-2925.07) 1(9114.63,-2925.07) 1(9115.08,-2980.52) 1(9115.08,-2980.52) 1(9115.54,-3069.07) 1(9115.54,-3069.07) 1(9115.54,-2925.07) 1(9115.54,-2925.07) 1(9116.87,-2926.39) 1(9116.87,-2926.39) 1(9117.78,-2926.39) 1(9117.78,-2926.39) 1(9118.65,-3068.62) 1(9118.65,-3068.62) 1(9118.65,-3031.96) 1(9118.65,-3031.96) 1(9118.65,-2983.21) 1(9118.65,-2983.21) 1(9119.56,-2928.17) 1(9119.56,-2928.17) 1(9120.47,-2928.17) 1(9120.47,-2928.17) 1(9121.34,-2929.54) 1(9121.34,-2929.54) 1(9121.79,-3030.6) 1(9121.79,-3030.6) 1(9121.79,-2985) 1(9121.79,-2985) 1(9122.25,-2929.54) 1(9122.25,-2929.54) 1(9123.12,-2930.87) 1(9123.12,-2930.87) 1(9123.58,-3066.84) 1(9123.58,-3066.84) 1(9124.03,-2985.87) 1(9124.03,-2985.87) 1(9124.03,-2930.87) 1(9124.03,-2930.87) 1(9124.48,-2931.78) 1(9124.48,-2931.78) 1(9125.36,-2931.78) 1(9125.36,-2931.78) 1(9125.81,-2932.65) 1(9125.81,-2932.65) 1(9126.72,-2932.65) 1(9126.72,-2932.65) 1(9127.18,-2988.11) 1(9127.18,-2988.11) 1(9128.05,-3029.73) 1(9128.05,-3029.73) 1(9128.05,-2934.01) 1(9128.05,-2934.01) 1(9128.5,-3065.97) 1(9128.5,-3065.97) 1(9128.96,-2934.01) 1(9128.96,-2934.01) 1(9130.28,-2989.47) 1(9130.28,-2989.47) 1(9130.74,-2935.79) 1(9130.74,-2935.79) 1(9131.65,-3064.6) 1(9131.65,-3064.6) 1(9131.65,-2990.8) 1(9131.65,-2990.8) 1(9131.65,-2935.79) 1(9131.65,-2935.79) 1(9132.52,-2937.12) 1(9132.52,-2937.12) 1(9132.98,-3027.94) 1(9132.98,-3027.94) 1(9132.98,-2991.25) 1(9132.98,-2991.25) 1(9133.43,-2937.12) 1(9133.43,-2937.12) 1(9134.3,-2992.58) 1(9134.3,-2992.58) 1(9134.3,-2938.48) 1(9134.3,-2938.48) 1(9134.76,-3064.15) 1(9134.76,-3064.15) 1(9135.21,-2938.48) 1(9135.21,-2938.48) 1(9135.67,-2993.03) 1(9135.67,-2993.03) 1(9135.67,-2939.36) 1(9135.67,-2939.36) 1(9136.54,-2939.36) 1(9136.54,-2939.36) 1(9136.99,-2994.4) 1(9136.99,-2994.4) 1(9136.99,-2940.27) 1(9136.99,-2940.27) 1(9137.9,-3062.82) 1(9137.9,-3062.82) 1(9137.9,-3027.04) 1(9137.9,-3027.04) 1(9137.9,-2940.27) 1(9137.9,-2940.27) 1(9138.36,-2994.82) 1(9138.36,-2994.82) 1(9139.23,-2941.59) 1(9139.23,-2941.59) 1(9139.69,-2996.18) 1(9139.69,-2996.18) 1(9140.14,-2941.59) 1(9140.14,-2941.59) 1(9141.01,-3062.36) 1(9141.01,-3062.36) 1(9141.01,-3025.71) 1(9141.01,-3025.71) 1(9141.01,-2996.63) 1(9141.01,-2996.63) 1(9141.92,-2943.38) 1(9141.92,-2943.38) 1(9142.83,-2943.38) 1(9142.83,-2943.38) 1(9143.71,-2944.74) 1(9143.71,-2944.74) 1(9144.16,-3061.04) 1(9144.16,-3061.04) 1(9144.61,-2999.29) 1(9144.61,-2999.29) 1(9144.61,-2944.74) 1(9144.61,-2944.74) 1(9145.49,-2946.07) 1(9145.49,-2946.07) 1(9145.94,-2999.74) 1(9145.94,-2999.74) 1(9146.39,-2946.07) 1(9146.39,-2946.07) 1(9146.85,-2946.98) 1(9146.85,-2946.98) 1(9147.3,-3060.58) 1(9147.3,-3060.58) 1(9147.72,-3024.34) 1(9147.72,-3024.34) 1(9147.72,-2946.98) 1(9147.72,-2946.98) 1(9148.18,-2947.85) 1(9148.18,-2947.85) 1(9149.09,-3001.98) 1(9149.09,-3001.98) 1(9149.09,-2947.85) 1(9149.09,-2947.85) 1(9149.54,-2948.76) 1(9149.54,-2948.76) 1(9150.41,-3059.25) 1(9150.41,-3059.25) 1(9150.41,-3002.43) 1(9150.41,-3002.43) 1(9150.41,-2948.76) 1(9150.41,-2948.76) 1(9150.87,-2949.67) 1(9150.87,-2949.67) 1(9151.78,-2949.67) 1(9151.78,-2949.67) 1(9152.65,-2950.99) 1(9152.65,-2950.99) 1(9153.56,-3058.8) 1(9153.56,-3058.8) 1(9153.56,-3004.67) 1(9153.56,-3004.67) 1(9153.56,-2950.99) 1(9153.56,-2950.99) 1(9154.43,-3022.11) 1(9154.43,-3022.11) 1(9154.43,-2952.32) 1(9154.43,-2952.32) 1(9154.89,-3005.12) 1(9154.89,-3005.12) 1(9155.34,-2952.32) 1(9155.34,-2952.32) 1(9156.25,-3006.45) 1(9156.25,-3006.45) 1(9156.25,-2953.69) 1(9156.25,-2953.69) 1(9156.67,-3057.44) 1(9156.67,-3057.44) 1(9157.12,-2953.69) 1(9157.12,-2953.69) 1(9157.58,-3006.91) 1(9157.58,-3006.91) 1(9158.03,-2955.01) 1(9158.03,-2955.01) 1(9158.91,-3008.23) 1(9158.91,-3008.23) 1(9158.91,-2955.01) 1(9158.91,-2955.01) 1(9159.36,-3021.23) 1(9159.36,-3021.23) 1(9159.36,-2955.92) 1(9159.36,-2955.92) 1(9159.81,-3057.02) 1(9159.81,-3057.02) 1(9160.27,-3008.69) 1(9160.27,-3008.69) 1(9160.27,-2955.92) 1(9160.27,-2955.92) 1(9160.72,-2956.8) 1(9160.72,-2956.8) 1(9161.6,-3010.05) 1(9161.6,-3010.05) 1(9161.6,-2956.8) 1(9161.6,-2956.8) 1(9162.05,-2957.7) 1(9162.05,-2957.7) 1(9162.51,-3055.65) 1(9162.51,-3055.65) 1(9162.96,-3010.47) 1(9162.96,-3010.47) 1(9162.96,-2957.7) 1(9162.96,-2957.7) 1(9163.83,-2959.03) 1(9163.83,-2959.03) 1(9164.29,-3019.42) 1(9164.29,-3019.42) 1(9164.29,-3011.83) 1(9164.29,-3011.83) 1(9164.74,-2959.03) 1(9164.74,-2959.03) 1(9165.62,-3055.2) 1(9165.62,-3055.2) 1(9165.62,-3012.29) 1(9165.62,-3012.29) 1(9165.62,-2960.39) 1(9165.62,-2960.39) 1(9166.52,-2960.39) 1(9166.52,-2960.39) 1(9166.98,-3013.62) 1(9166.98,-3013.62) 1(9167.43,-3019) 1(9167.43,-3019) 1(9167.43,-2961.72) 1(9167.43,-2961.72) 1(9168.31,-2961.72) 1(9168.31,-2961.72) 1(9169.21,-2963.09) 1(9169.21,-2963.09) 1(9169.67,-3053.42) 1(9169.67,-3053.42) 1(9170.09,-2963.09) 1(9170.09,-2963.09) 1(9170.54,-3015.85) 1(9170.54,-3015.85) 1(9171,-2964.41) 1(9171,-2964.41) 1(9171.91,-3016.31) 1(9171.91,-3016.31) 1(9171.91,-2964.41) 1(9171.91,-2964.41) 1(9172.32,-3017.63) 1(9172.32,-3017.63) 1(9172.78,-3052.97) 1(9172.78,-3052.97) 1(9172.78,-2965.74) 1(9172.78,-2965.74) 1(9173.69,-2965.74) 1(9173.69,-2965.74) 1(9174.56,-2967.1) 1(9174.56,-2967.1) 1(9175.47,-2967.1) 1(9175.47,-2967.1) 1(9176.38,-2968.43) 1(9176.38,-2968.43) 1(9177.25,-2968.43) 1(9177.25,-2968.43) 1(9178.16,-2969.8) 1(9178.16,-2969.8) 1(9179.03,-2969.8) 1(9179.03,-2969.8) 1(9180.85,-2972.03) 1(9180.85,-2972.03) 1(9181.72,-2972.03) 1(9181.72,-2972.03) 1(9183.51,-2974.27) 1(9183.51,-2974.27) 1(9184.41,-2974.27) 1(9184.41,-2974.27) 1(9185.32,-3048.49) 1(9185.32,-3048.49) 1(9185.32,-2975.6) 1(9185.32,-2975.6) 1(9186.2,-2975.6) 1(9186.2,-2975.6) 1(9187.11,-2976.92) 1(9187.11,-2976.92) 1(9187.98,-2976.92) 1(9187.98,-2976.92) 1(9188.43,-3048.07) 1(9188.43,-3048.07) 1(9188.89,-2978.29) 1(9188.89,-2978.29) 1(9189.8,-2978.29) 1(9189.8,-2978.29) 1(9190.67,-2979.62) 1(9190.67,-2979.62) 1(9191.58,-3046.71) 1(9191.58,-3046.71) 1(9191.58,-2979.62) 1(9191.58,-2979.62) 1(9192.45,-2980.98) 1(9192.45,-2980.98) 1(9193.36,-2980.98) 1(9193.36,-2980.98) 1(9194.27,-2982.31) 1(9194.27,-2982.31) 1(9194.69,-3046.25) 1(9194.69,-3046.25) 1(9195.14,-2982.31) 1(9195.14,-2982.31) 1(9196.93,-2984.54) 1(9196.93,-2984.54) 1(9197.83,-2984.54) 1(9197.83,-2984.54) 1(9199.16,-2986.32) 1(9199.16,-2986.32) 1(9200.07,-2986.32) 1(9200.07,-2986.32) 1(9201.85,-2988.56) 1(9201.85,-2988.56) 1(9202.76,-2988.56) 1(9202.76,-2988.56) 1(9204.54,-2990.8) 1(9204.54,-2990.8) 1(9205.45,-2990.8) 1(9205.45,-2990.8) 1(9206.33,-2992.16) 1(9206.33,-2992.16) 1(9207.23,-2992.16) 1(9207.23,-2992.16) 1(9208.11,-3041.36) 1(9208.11,-3041.36) 1(9208.11,-2993.49) 1(9208.11,-2993.49) 1(9209.02,-2993.49) 1(9209.02,-2993.49) 1(9209.47,-3041.78) 1(9209.47,-3041.78) 1(9209.93,-2994.82) 1(9209.93,-2994.82) 1(9210.8,-3042.24) 1(9210.8,-3042.24) 1(9210.8,-2994.82) 1(9210.8,-2994.82) 1(9212.58,-3044.02) 1(9212.58,-3044.02) 1(9213.95,-3044.47) 1(9213.95,-3044.47) 1(9214.4,-2998.87) 1(9214.4,-2998.87) 1(9215.27,-3045.84) 1(9215.27,-3045.84) 1(9215.27,-2998.87) 1(9215.27,-2998.87) 1(9215.73,-2999.74) 1(9215.73,-2999.74) 1(9216.63,-3046.25) 1(9216.63,-3046.25) 1(9216.63,-2999.74) 1(9216.63,-2999.74) 1(9217.96,-3047.62) 1(9217.96,-3047.62) 1(9218.42,-3001.98) 1(9218.42,-3001.98) 1(9219.29,-3048.07) 1(9219.29,-3048.07) 1(9219.29,-3001.98) 1(9219.29,-3001.98) 1(9220.2,-3003.34) 1(9220.2,-3003.34) 1(9220.65,-3049.4) 1(9220.65,-3049.4) 1(9221.11,-3003.34) 1(9221.11,-3003.34) 1(9221.53,-3004.22) 1(9221.53,-3004.22) 1(9221.98,-3049.86) 1(9221.98,-3049.86) 1(9223.34,-3051.18) 1(9223.34,-3051.18) 1(9224.67,-3051.64) 1(9224.67,-3051.64) 1(9226.45,-3053.42) 1(9226.45,-3053.42) 1(9227.82,-3053.87) 1(9227.82,-3053.87) 1(9228.69,-3002.43) 1(9228.69,-3002.43) 1(9229.15,-3055.2) 1(9229.15,-3055.2) 1(9230.47,-3055.65) 1(9230.47,-3055.65) 1(9231.83,-3001.11) 1(9231.83,-3001.11) 1(9232.29,-3057.44) 1(9232.29,-3057.44) 1(9233.62,-3057.89) 1(9233.62,-3057.89) 1(9234.94,-3059.25) 1(9234.94,-3059.25) 1(9234.94,-3000.65) 1(9234.94,-3000.65) 1(9236.31,-3059.67) 1(9236.31,-3059.67) 1(9236.76,-3060.58) 1(9236.76,-3060.58) 1(9238.09,-3061.04) 1(9238.09,-3061.04) 1(9238.09,-2999.29) 1(9238.09,-2999.29) 1(9239.42,-3062.36) 1(9239.42,-3062.36) 1(9240.78,-3062.82) 1(9240.78,-3062.82) 1(9241.24,-2998.87) 1(9241.24,-2998.87) 1(9242.56,-3064.6) 1(9242.56,-3064.6) 1(9244.35,-2997.51) 1(9244.35,-2997.51) 1(9246.13,-3066.84) 1(9246.13,-3066.84) 1(9247.49,-3067.29) 1(9247.49,-3067.29) 1(9247.49,-2997.05) 1(9247.49,-2997.05) 1(9247.95,-3068.2) 1(9247.95,-3068.2) 1(9249.28,-3068.62) 1(9249.28,-3068.62) 1(9249.73,-3069.53) 1(9249.73,-3069.53) 1(9249.73,-3027.94) 1(9249.73,-3027.94) 1(9250.18,-3028.82) 1(9250.18,-3028.82) 1(9250.6,-2995.72) 1(9250.6,-2995.72) 1(9251.05,-3069.98) 1(9251.05,-3069.98) 1(9251.05,-3028.82) 1(9251.05,-3028.82) 1(9251.51,-3070.86) 1(9251.51,-3070.86) 1(9252.84,-3071.31) 1(9252.84,-3071.31) 1(9253.29,-3072.22) 1(9253.29,-3072.22) 1(9253.75,-2995.27) 1(9253.75,-2995.27) 1(9254.65,-3072.67) 1(9254.65,-3072.67) 1(9255.07,-3073.55) 1(9255.07,-3073.55) 1(9255.07,-3033.29) 1(9255.07,-3033.29) 1(9255.98,-3033.29) 1(9255.98,-3033.29) 1(9256.44,-3074) 1(9256.44,-3074) 1(9256.89,-3074.91) 1(9256.89,-3074.91) 1(9257.76,-3035.53) 1(9257.76,-3035.53) 1(9258.22,-3075.33) 1(9258.22,-3075.33) 1(9258.22,-2993.49) 1(9258.22,-2993.49) 1(9258.67,-3035.53) 1(9258.67,-3035.53) 1(9260,-3077.15) 1(9260,-3077.15) 1(9261.37,-3077.57) 1(9261.37,-3077.57) 1(9261.37,-3038.67) 1(9261.37,-3038.67) 1(9261.37,-2993.03) 1(9261.37,-2993.03) 1(9262.24,-3038.67) 1(9262.24,-3038.67) 1(9263.15,-3079.38) 1(9263.15,-3079.38) 1(9264.48,-3079.8) 1(9264.48,-3079.8) 1(9264.48,-2991.71) 1(9264.48,-2991.71) 1(9264.93,-3080.71) 1(9264.93,-3080.71) 1(9265.39,-3042.24) 1(9265.39,-3042.24) 1(9266.25,-3081.17) 1(9266.25,-3081.17) 1(9266.25,-3042.24) 1(9266.25,-3042.24) 1(9267.62,-3082.49) 1(9267.62,-3082.49) 1(9267.62,-3021.65) 1(9267.62,-3021.65) 1(9267.62,-2991.25) 1(9267.62,-2991.25) 1(9268.95,-3082.95) 1(9268.95,-3082.95) 1(9268.95,-3045.38) 1(9268.95,-3045.38) 1(9268.95,-2990.34) 1(9268.95,-2990.34) 1(9269.86,-3045.38) 1(9269.86,-3045.38) 1(9270.73,-3084.73) 1(9270.73,-3084.73) 1(9272.09,-3085.18) 1(9272.09,-3085.18) 1(9273.88,-3086.97) 1(9273.88,-3086.97) 1(9273.88,-2989.47) 1(9273.88,-2989.47) 1(9274.33,-3050.31) 1(9274.33,-3050.31) 1(9275.2,-3087.42) 1(9275.2,-3087.42) 1(9275.2,-3050.31) 1(9275.2,-3050.31) 1(9275.66,-3088.33) 1(9275.66,-3088.33) 1(9276.57,-3052.09) 1(9276.57,-3052.09) 1(9277.02,-3088.75) 1(9277.02,-3088.75) 1(9277.02,-2988.11) 1(9277.02,-2988.11) 1(9277.44,-3052.09) 1(9277.44,-3052.09) 1(9278.35,-3090.11) 1(9278.35,-3090.11) 1(9279.26,-3017.63) 1(9279.26,-3017.63) 1(9279.68,-3090.57) 1(9279.68,-3090.57) 1(9280.13,-3091.44) 1(9280.13,-3091.44) 1(9280.13,-3055.2) 1(9280.13,-3055.2) 1(9280.13,-2987.69) 1(9280.13,-2987.69) 1(9281.04,-3055.2) 1(9281.04,-3055.2) 1(9281.49,-3091.89) 1(9281.49,-3091.89) 1(9281.49,-3056.56) 1(9281.49,-3056.56) 1(9281.91,-3056.56) 1(9281.91,-3056.56) 1(9282.82,-3093.22) 1(9282.82,-3093.22) 1(9283.28,-2986.32) 1(9283.28,-2986.32) 1(9284.15,-3093.68) 1(9284.15,-3093.68) 1(9284.15,-3059.25) 1(9284.15,-3059.25) 1(9285.06,-3059.25) 1(9285.06,-3059.25) 1(9285.51,-3015.85) 1(9285.51,-3015.85) 1(9285.96,-3095.46) 1(9285.96,-3095.46) 1(9286.38,-2985.87) 1(9286.38,-2985.87) 1(9287.29,-3095.91) 1(9287.29,-3095.91) 1(9288.62,-3097.28) 1(9288.62,-3097.28) 1(9289.53,-2984.54) 1(9289.53,-2984.54) 1(9289.98,-3097.69) 1(9289.98,-3097.69) 1(9290.44,-3098.6) 1(9290.44,-3098.6) 1(9290.44,-3013.62) 1(9290.44,-3013.62) 1(9291.77,-3099.06) 1(9291.77,-3099.06) 1(9291.77,-3066.38) 1(9291.77,-3066.38) 1(9292.68,-3066.38) 1(9292.68,-3066.38) 1(9292.68,-2984.09) 1(9292.68,-2984.09) 1(9293.55,-3100.84) 1(9293.55,-3100.84) 1(9294.91,-3101.29) 1(9294.91,-3101.29) 1(9295.33,-3102.17) 1(9295.33,-3102.17) 1(9295.79,-2982.76) 1(9295.79,-2982.76) 1(9296.24,-3070.44) 1(9296.24,-3070.44) 1(9296.7,-3102.62) 1(9296.7,-3102.62) 1(9296.7,-3011.83) 1(9296.7,-3011.83) 1(9297.15,-3070.44) 1(9297.15,-3070.44) 1(9298.48,-3104.4) 1(9298.48,-3104.4) 1(9298.93,-2982.31) 1(9298.93,-2982.31) 1(9299.81,-3104.86) 1(9299.81,-3104.86) 1(9300.26,-2981.4) 1(9300.26,-2981.4) 1(9300.71,-3106.22) 1(9300.71,-3106.22) 1(9301.62,-3075.33) 1(9301.62,-3075.33) 1(9301.62,-3009.6) 1(9301.62,-3009.6) 1(9302.04,-3106.64) 1(9302.04,-3106.64) 1(9302.49,-3107.55) 1(9302.49,-3107.55) 1(9302.49,-3075.33) 1(9302.49,-3075.33) 1(9303.41,-2980.98) 1(9303.41,-2980.98) 1(9303.86,-3108) 1(9303.86,-3108) 1(9304.28,-3108.88) 1(9304.28,-3108.88) 1(9305.64,-3109.33) 1(9305.64,-3109.33) 1(9306.09,-3110.24) 1(9306.09,-3110.24) 1(9306.51,-3079.8) 1(9306.51,-3079.8) 1(9307.42,-3110.69) 1(9307.42,-3110.69) 1(9307.42,-3079.8) 1(9307.42,-3079.8) 1(9307.88,-3111.57) 1(9307.88,-3111.57) 1(9307.88,-3007.82) 1(9307.88,-3007.82) 1(9307.88,-2979.16) 1(9307.88,-2979.16) 1(9309.2,-3112.02) 1(9309.2,-3112.02) 1(9310.99,-3113.8) 1(9310.99,-3113.8) 1(9310.99,-2978.74) 1(9310.99,-2978.74) 1(9312.35,-3114.26) 1(9312.35,-3114.26) 1(9312.8,-3005.58) 1(9312.8,-3005.58) 1(9313.22,-3086.09) 1(9313.22,-3086.09) 1(9314.13,-3116.04) 1(9314.13,-3116.04) 1(9314.13,-3086.09) 1(9314.13,-3086.09) 1(9315.46,-3116.49) 1(9315.46,-3116.49) 1(9315.46,-2976.92) 1(9315.46,-2976.92) 1(9317.27,-3118.28) 1(9317.27,-3118.28) 1(9318.15,-3090.57) 1(9318.15,-3090.57) 1(9318.61,-3118.73) 1(9318.61,-3118.73) 1(9318.61,-2976.51) 1(9318.61,-2976.51) 1(9319.06,-3119.64) 1(9319.06,-3119.64) 1(9319.06,-3090.57) 1(9319.06,-3090.57) 1(9320.39,-3120.06) 1(9320.39,-3120.06) 1(9320.84,-3120.97) 1(9320.84,-3120.97) 1(9321.75,-2975.14) 1(9321.75,-2975.14) 1(9322.17,-3121.42) 1(9322.17,-3121.42) 1(9322.62,-3122.3) 1(9322.62,-3122.3) 1(9323.99,-3122.75) 1(9323.99,-3122.75) 1(9324.41,-3123.66) 1(9324.41,-3123.66) 1(9324.86,-2974.69) 1(9324.86,-2974.69) 1(9325.77,-3124.11) 1(9325.77,-3124.11) 1(9326.22,-3124.99) 1(9326.22,-3124.99) 1(9326.22,-2973.81) 1(9326.22,-2973.81) 1(9327.1,-3001.11) 1(9327.1,-3001.11) 1(9327.55,-3125.44) 1(9327.55,-3125.44) 1(9328,-3126.35) 1(9328,-3126.35) 1(9329.33,-3126.77) 1(9329.33,-3126.77) 1(9329.33,-3101.29) 1(9329.33,-3101.29) 1(9329.33,-2999.74) 1(9329.33,-2999.74) 1(9329.33,-2973.36) 1(9329.33,-2973.36) 1(9329.79,-3127.68) 1(9329.79,-3127.68) 1(9330.24,-3101.29) 1(9330.24,-3101.29) 1(9331.12,-3128.13) 1(9331.12,-3128.13) 1(9331.57,-3129) 1(9331.57,-3129) 1(9331.57,-2999.29) 1(9331.57,-2999.29) 1(9332.48,-2972.03) 1(9332.48,-2972.03) 1(9332.93,-3129.46) 1(9332.93,-3129.46) 1(9333.81,-2997.96) 1(9333.81,-2997.96) 1(9334.72,-3131.24) 1(9334.72,-3131.24) 1(9334.72,-3106.22) 1(9334.72,-3106.22) 1(9335.59,-3106.22) 1(9335.59,-3106.22) 1(9335.59,-2971.58) 1(9335.59,-2971.58) 1(9336.04,-3131.7) 1(9336.04,-3131.7) 1(9336.49,-3132.6) 1(9336.49,-3132.6) 1(9336.95,-2970.67) 1(9336.95,-2970.67) 1(9337.82,-3133.06) 1(9337.82,-3133.06) 1(9338.28,-3133.93) 1(9338.28,-3133.93) 1(9339.65,-3134.39) 1(9339.65,-3134.39) 1(9340.06,-3135.3) 1(9340.06,-3135.3) 1(9341.42,-3135.71) 1(9341.42,-3135.71) 1(9341.88,-2969.8) 1(9341.88,-2969.8) 1(9343.21,-3137.53) 1(9343.21,-3137.53) 1(9344.12,-3115.17) 1(9344.12,-3115.17) 1(9344.12,-2994.82) 1(9344.12,-2994.82) 1(9344.53,-3137.95) 1(9344.53,-3137.95) 1(9344.99,-3115.17) 1(9344.99,-3115.17) 1(9344.99,-2968.43) 1(9344.99,-2968.43) 1(9345.44,-3139.31) 1(9345.44,-3139.31) 1(9346.77,-3139.77) 1(9346.77,-3139.77) 1(9347.23,-3140.64) 1(9347.23,-3140.64) 1(9348.13,-2967.98) 1(9348.13,-2967.98) 1(9348.59,-3141.1) 1(9348.59,-3141.1) 1(9349.01,-3142.01) 1(9349.01,-3142.01) 1(9349.01,-2992.58) 1(9349.01,-2992.58) 1(9350.37,-3142.42) 1(9350.37,-3142.42) 1(9350.37,-3120.97) 1(9350.37,-3120.97) 1(9350.83,-3143.33) 1(9350.83,-3143.33) 1(9351.24,-3120.97) 1(9351.24,-3120.97) 1(9351.24,-2966.65) 1(9351.24,-2966.65) 1(9352.15,-3143.79) 1(9352.15,-3143.79) 1(9352.6,-3144.66) 1(9352.6,-3144.66) 1(9353.94,-3145.12) 1(9353.94,-3145.12) 1(9353.94,-3124.11) 1(9353.94,-3124.11) 1(9353.94,-2991.25) 1(9353.94,-2991.25) 1(9354.39,-3146.02) 1(9354.39,-3146.02) 1(9354.39,-2966.2) 1(9354.39,-2966.2) 1(9354.85,-3124.11) 1(9354.85,-3124.11) 1(9355.71,-3146.48) 1(9355.71,-3146.48) 1(9356.17,-3147.35) 1(9356.17,-3147.35) 1(9357.53,-3147.81) 1(9357.53,-3147.81) 1(9357.53,-2964.87) 1(9357.53,-2964.87) 1(9357.95,-3148.71) 1(9357.95,-3148.71) 1(9358.87,-2989.01) 1(9358.87,-2989.01) 1(9359.32,-3149.13) 1(9359.32,-3149.13) 1(9359.77,-3150.04) 1(9359.77,-3150.04) 1(9360.64,-2964.41) 1(9360.64,-2964.41) 1(9361.1,-3150.5) 1(9361.1,-3150.5) 1(9361.55,-3151.37) 1(9361.55,-3151.37) 1(9362.88,-3151.82) 1(9362.88,-3151.82) 1(9363.79,-2987.69) 1(9363.79,-2987.69) 1(9363.79,-2963.09) 1(9363.79,-2963.09) 1(9364.66,-3153.61) 1(9364.66,-3153.61) 1(9365.12,-3134.84) 1(9365.12,-3134.84) 1(9366.03,-3154.06) 1(9366.03,-3154.06) 1(9366.03,-3134.84) 1(9366.03,-3134.84) 1(9366.03,-2986.32) 1(9366.03,-2986.32) 1(9366.48,-3154.97) 1(9366.48,-3154.97) 1(9366.9,-2962.63) 1(9366.9,-2962.63) 1(9367.8,-3155.42) 1(9367.8,-3155.42) 1(9368.26,-3156.3) 1(9368.26,-3156.3) 1(9368.26,-2985.87) 1(9368.26,-2985.87) 1(9369.14,-3138.41) 1(9369.14,-3138.41) 1(9369.59,-3156.75) 1(9369.59,-3156.75) 1(9370.05,-3138.41) 1(9370.05,-3138.41) 1(9370.05,-2961.27) 1(9370.05,-2961.27) 1(9370.5,-2984.54) 1(9370.5,-2984.54) 1(9371.37,-3158.53) 1(9371.37,-3158.53) 1(9372.73,-3158.99) 1(9372.73,-3158.99) 1(9372.73,-2984.09) 1(9372.73,-2984.09) 1(9373.19,-3159.9) 1(9373.19,-3159.9) 1(9373.19,-2960.85) 1(9373.19,-2960.85) 1(9374.07,-3142.88) 1(9374.07,-3142.88) 1(9374.52,-3160.32) 1(9374.52,-3160.32) 1(9374.97,-3161.23) 1(9374.97,-3161.23) 1(9374.97,-3142.88) 1(9374.97,-3142.88) 1(9374.97,-2982.76) 1(9374.97,-2982.76) 1(9376.3,-3161.68) 1(9376.3,-3161.68) 1(9376.3,-2959.49) 1(9376.3,-2959.49) 1(9377.21,-2982.31) 1(9377.21,-2982.31) 1(9378.08,-3163.46) 1(9378.08,-3163.46) 1(9379.44,-3163.91) 1(9379.44,-3163.91) 1(9379.44,-2980.98) 1(9379.44,-2980.98) 1(9379.9,-3164.79) 1(9379.9,-3164.79) 1(9381.23,-3165.24) 1(9381.23,-3165.24) 1(9381.23,-2958.61) 1(9381.23,-2958.61) 1(9381.68,-2980.52) 1(9381.68,-2980.52) 1(9382.56,-3150.95) 1(9382.56,-3150.95) 1(9383.01,-3167.03) 1(9383.01,-3167.03) 1(9383.46,-3150.95) 1(9383.46,-3150.95) 1(9383.92,-2979.16) 1(9383.92,-2979.16) 1(9384.37,-3167.48) 1(9384.37,-3167.48) 1(9384.37,-2957.25) 1(9384.37,-2957.25) 1(9385.25,-3168.84) 1(9385.25,-3168.84) 1(9386.16,-2978.74) 1(9386.16,-2978.74) 1(9386.61,-3169.26) 1(9386.61,-3169.26) 1(9387.03,-3170.17) 1(9387.03,-3170.17) 1(9387.48,-2956.8) 1(9387.48,-2956.8) 1(9388.39,-3170.62) 1(9388.39,-3170.62) 1(9388.39,-2977.38) 1(9388.39,-2977.38) 1(9389.27,-3171.95) 1(9389.27,-3171.95) 1(9389.72,-3157.66) 1(9389.72,-3157.66) 1(9390.63,-3172.41) 1(9390.63,-3172.41) 1(9390.63,-3157.66) 1(9390.63,-3157.66) 1(9390.63,-2976.92) 1(9390.63,-2976.92) 1(9390.63,-2955.47) 1(9390.63,-2955.47) 1(9391.08,-3173.32) 1(9391.08,-3173.32) 1(9392.41,-3173.73) 1(9392.41,-3173.73) 1(9392.86,-3174.64) 1(9392.86,-3174.64) 1(9393.32,-3160.77) 1(9393.32,-3160.77) 1(9393.74,-2955.01) 1(9393.74,-2955.01) 1(9394.19,-3175.1) 1(9394.19,-3175.1) 1(9394.19,-3160.77) 1(9394.19,-3160.77) 1(9394.19,-2975.14) 1(9394.19,-2975.14) 1(9394.65,-3175.97) 1(9394.65,-3175.97) 1(9395.97,-3176.43) 1(9395.97,-3176.43) 1(9396.43,-2974.69) 1(9396.43,-2974.69) 1(9397.79,-3178.21) 1(9397.79,-3178.21) 1(9398.66,-2973.36) 1(9398.66,-2973.36) 1(9398.66,-2953.23) 1(9398.66,-2953.23) 1(9399.12,-3178.66) 1(9399.12,-3178.66) 1(9400.9,-3180.45) 1(9400.9,-3180.45) 1(9400.9,-2972.9) 1(9400.9,-2972.9) 1(9401.81,-2952.78) 1(9401.81,-2952.78) 1(9402.26,-3180.9) 1(9402.26,-3180.9) 1(9402.68,-3181.81) 1(9402.68,-3181.81) 1(9403.14,-2971.58) 1(9403.14,-2971.58) 1(9403.59,-3170.62) 1(9403.59,-3170.62) 1(9404.05,-3182.26) 1(9404.05,-3182.26) 1(9404.5,-3170.62) 1(9404.5,-3170.62) 1(9405.38,-2971.12) 1(9405.38,-2971.12) 1(9405.83,-3184.04) 1(9405.83,-3184.04) 1(9406.28,-2970.21) 1(9406.28,-2970.21) 1(9407.15,-3173.73) 1(9407.15,-3173.73) 1(9408.06,-3173.73) 1(9408.06,-3173.73) 1(9408.52,-2969.8) 1(9408.52,-2969.8) 1(9408.98,-3185.37) 1(9408.98,-3185.37) 1(9410.3,-3186.73) 1(9410.3,-3186.73) 1(9410.75,-2968.43) 1(9410.75,-2968.43) 1(9411.63,-3187.15) 1(9411.63,-3187.15) 1(9412.08,-3178.21) 1(9412.08,-3178.21) 1(9412.54,-3188.52) 1(9412.54,-3188.52) 1(9412.54,-2950.08) 1(9412.54,-2950.08) 1(9412.99,-3178.21) 1(9412.99,-3178.21) 1(9412.99,-2967.98) 1(9412.99,-2967.98) 1(9415.68,-3190.3) 1(9415.68,-3190.3) 1(9416.56,-3182.26) 1(9416.56,-3182.26) 1(9416.56,-2966.2) 1(9416.56,-2966.2) 1(9416.56,-2948.3) 1(9416.56,-2948.3) 1(9417.47,-3186.73) 1(9417.47,-3186.73) 1(9417.47,-3182.26) 1(9417.47,-3182.26) 1(9417.92,-3186.73) 1(9417.92,-3186.73) 1(9417.92,-3184.04) 1(9417.92,-3184.04) 1(9417.92,-3183.59) 1(9417.92,-3183.59) 1(9418.34,-3189.84) 1(9418.34,-3189.84) 1(9418.34,-3184.5) 1(9418.34,-3184.5) 1(9418.79,-3189.84) 1(9418.79,-3189.84) 1(9418.79,-3183.59) 1(9418.79,-3183.59) 1(9418.79,-2965.74) 1(9418.79,-2965.74) 1(9419.25,-3191.21) 1(9419.25,-3191.21) 1(9421.03,-2964.41) 1(9421.03,-2964.41) 1(9423.26,-2963.96) 1(9423.26,-2963.96) 1(9424.18,-2963.09) 1(9424.18,-2963.09) 1(9425.05,-2946.98) 1(9425.05,-2946.98) 1(9426.41,-2962.63) 1(9426.41,-2962.63) 1(9426.41,-2946.07) 1(9426.41,-2946.07) 1(9429.52,-2960.85) 1(9429.52,-2960.85) 1(9429.52,-2945.61) 1(9429.52,-2945.61) 1(9431.76,-2960.39) 1(9431.76,-2960.39) 1(9433.58,-2959.03) 1(9433.58,-2959.03) 1(9435.81,-2958.61) 1(9435.81,-2958.61) 1(9436.69,-2957.7)
  round 1.64 on Mech7: 1(9436.69,-2957.7) 1(9438.92,-2957.25) 1(9438.92,-2957.25) 1(9441.16,-2955.92) 1(9441.16,-2955.92) 1(9443.39,-2955.47) 1(9443.39,-2955.47) 1(9446.08,-2941.59) 1(9446.08,-2941.59) 1(9450.56,-2951.45) 1(9450.56,-2951.45) 1(9452.8,-2950.99) 1(9452.8,-2950.99) 1(9453.7,-2950.08) 1(9453.7,-2950.08) 1(9455.94,-2949.67) 1(9455.94,-2949.67) 1(9458.59,-2938.48) 1(9458.59,-2938.48) 1(9459.51,-2947.43) 1(9459.51,-2947.43) 1(9462.65,-2946.52) 1(9462.65,-2946.52) 1(9465.76,-2944.28) 1(9465.76,-2944.28) 1(9469.78,-2942.5) 1(9469.78,-2942.5) 1(9469.78,-2937.12) 1(9469.78,-2937.12) 1(9472.47,-2939.81) 1(9472.47,-2939.81) 1(9472.92,-2938.03) 1(9472.92,-2938.03)

## Via types
v1: diameter 25.59, hole 11.81, Top Layer to Bottom Layer, 15 vias